# EAGLE board 08C-005 (EAGLE 6.3)
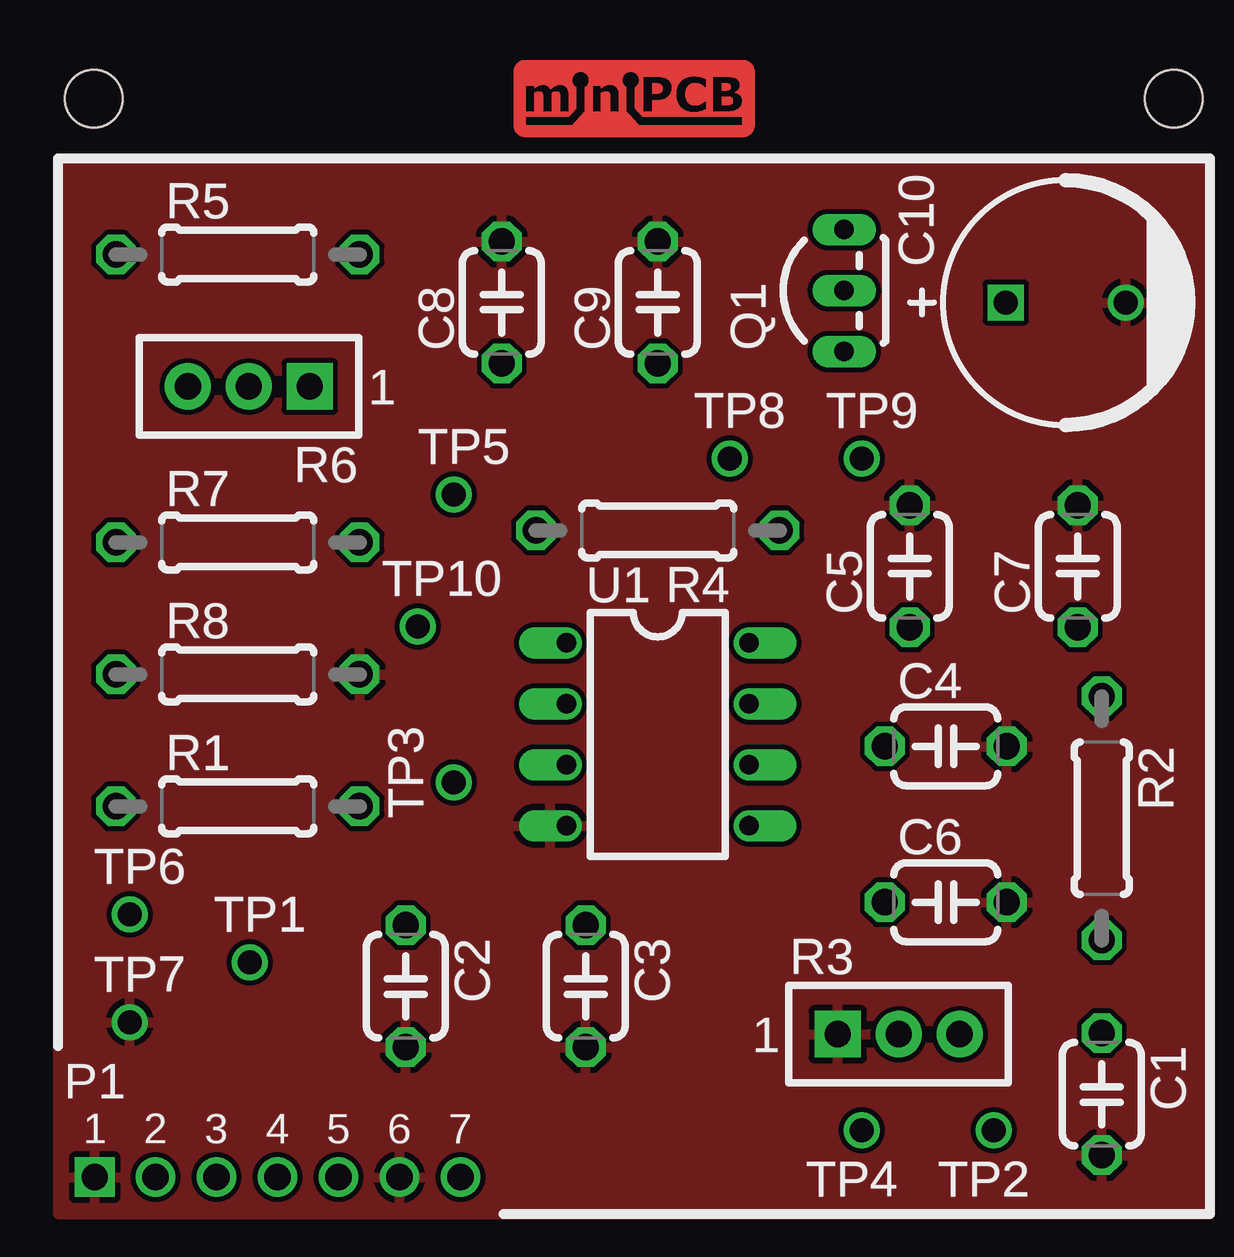
[diagram p0: board, top side]
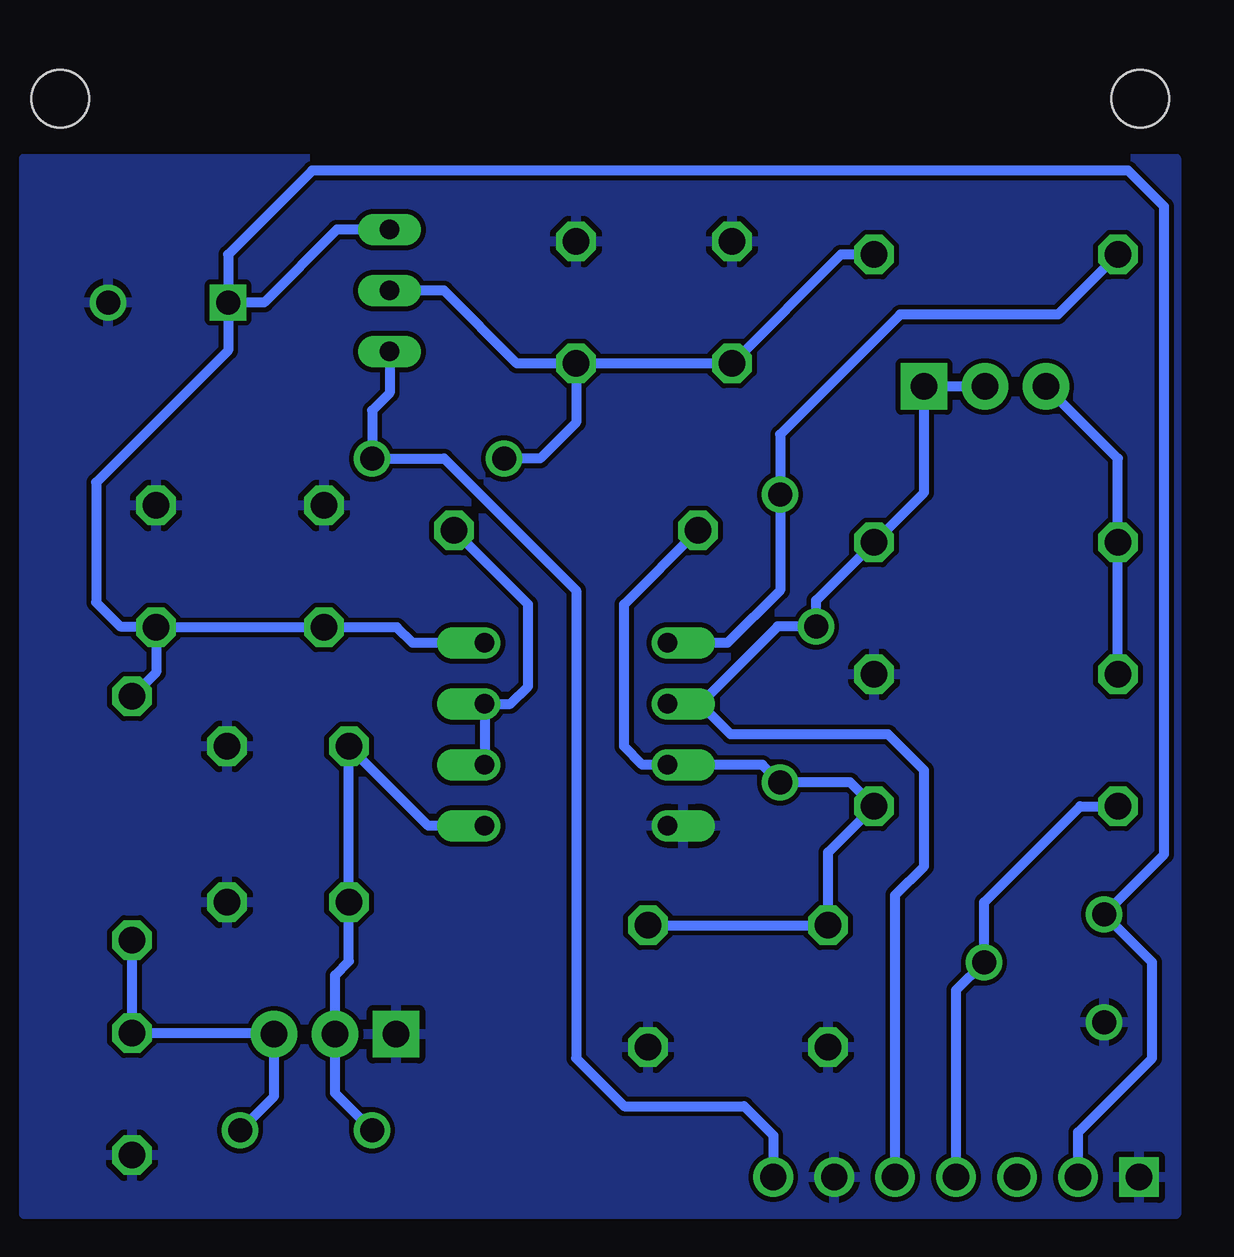
[diagram p1: board, bottom side, seen from below]

No outline drawn. Coordinates in mm, seen from the top.
Copper layers (1*16): Top 0.035mm / dielectric 1.5mm / Bottom 0.035mm
Design rules "minipcb": minimum track width 10mil, minimum drill 24mil, track to track 8mil, track to pad 8mil, pad to pad 8mil, via to via 8mil, smd to smd 8mil, copper to edge 40mil, drill to drill 8mil, minimum pad ring 10mil, minimum via ring 8mil, stop-mask expansion 4mil, vias tented up to drill 20mil, thermal gap 10mil

## Footprints (pad centres in the part's own frame; a part is rotated, then mirrored left to right if it is on the bottom)
C050-024X044 = drill 1.1 octagon: 1 -2.54,0; 2 2.54,0
C5MM = drill 1 square: + -2.5,0 | drill 1: - 2.5,0
MINIPCB_7P_50X50 = drill 1.1 square: 1 2.54,2.54 | drill 1.1: 2 5.08,2.54; 3 7.62,2.54; 4 10.16,2.54; 5 12.7,2.54; 6 15.24,2.54; 7 17.78,2.54 | hole 2.4: 47.5,47.5; 2.5,47.5
TO92-EBC-OVAL = drill 0.813 long: B 0,-1.27; C 2.54,-1.27; E -2.54,-1.27
0207/10 = drill 1.1 octagon: 1 -5.08,0; 2 5.08,0
TRIM_0100 = drill 1.1 pad 1.93 square: 1 0,0 | drill 1.1 pad 1.93: 2 2.54,0; 3 5.08,0
PINS_1_TESTPOINT_KE5000_NOTEXT = drill 1: 1 0,0
DIL08 = drill 0.813 offset: 1 -3.81,-3.81; 2 -1.27,-3.81; 3 1.27,-3.81; 4 3.81,-3.81; 5 3.81,3.81; 6 1.27,3.81; 7 -1.27,3.81; 8 -3.81,3.81

## Placement (x,y rotation side)
C1  [C050-024X044]  44.5,6 270 top
C2  [C050-024X044]  15.5,10.5 270 top
C3  [C050-024X044]  23,10.5 270 top
C4  [C050-024X044]  38,20.5 0 top
C5  [C050-024X044]  36.5,28 90 top
C6  [C050-024X044]  38,14 0 top
C7  [C050-024X044]  43.5,28 90 top
C8  [C050-024X044]  19.5,39 90 top
C9  [C050-024X044]  26,39 90 top
C10  [C5MM]  43,39 0 top
P1-  [MINIPCB_7P_50X50]  0,0 0 top
Q1  [TO92-EBC-OVAL]  32.5,39.5 90 top
R1  [0207/10]  8.5,18 0 top
R2  [0207/10]  44.5,17.5 270 top
R3  [TRIM_0100]  33.5,8.5 0 top
R4  [0207/10]  26,29.5 180 top
R5  [0207/10]  8.5,41 0 top
R6  [TRIM_0100]  11.5,35.5 180 top
R7  [0207/10]  8.5,29 0 top
R8  [0207/10]  8.5,23.5 0 top
TP1  [PINS_1_TESTPOINT_KE5000_NOTEXT]  9,11.5 0 top
TP2  [PINS_1_TESTPOINT_KE5000_NOTEXT]  40,4.5 180 top
TP3  [PINS_1_TESTPOINT_KE5000_NOTEXT]  17.5,19 90 top
TP4  [PINS_1_TESTPOINT_KE5000_NOTEXT]  34.5,4.5 180 top
TP5  [PINS_1_TESTPOINT_KE5000_NOTEXT]  17.5,31 0 top
TP6  [PINS_1_TESTPOINT_KE5000_NOTEXT]  4,13.5 0 top
TP7  [PINS_1_TESTPOINT_KE5000_NOTEXT]  4,9 0 top
TP8  [PINS_1_TESTPOINT_KE5000_NOTEXT]  29,32.5 0 top
TP9  [PINS_1_TESTPOINT_KE5000_NOTEXT]  34.5,32.5 0 top
TP10  [PINS_1_TESTPOINT_KE5000_NOTEXT]  16,25.5 0 top
U1  [DIL08]  26,21 270 top

## Library data of the parts
C1-C10 Q1 R1-R8 TP1-TP10 U1 = minipcb
P1- = minipcb; PART_NUMBER: X08C-005-A; REVISION: A

## Nets
BIAS: C4.1 C6.1 R3.2 TP4.1 U1.5
GND: C1.2 C2.2 C3.2 C4.2 C5.2 C6.2 C7.2 C8.2 C9.2 C10.- P1-.1 P1-.6 R3.1 R8.2 TP7.1 U1.4
IN: R4.1 U1.6 U1.7
N$1: C2.1 C3.1 R1.2 R4.2 TP3.1 U1.3
N$2: P1-.4 R1.1 TP1.1
OUT+: P1-.7 Q1.E TP9.1
OUT-: P1-.5 R6.1 R6.2 R7.2 TP10.1 U1.2
Q1.B: C8.1 C9.1 Q1.B R5.2 TP8.1
R2.3: C1.1 R2.2 R3.3 TP2.1
R6.3: R6.3 R7.1 R8.1
U1.1: R5.1 TP5.1 U1.1
V+: C5.1 C7.1 C10.+ P1-.2 Q1.C R2.1 TP6.1 U1.8

## Tracks (layer width: path | path; a pad name or v marks a point on that pad's centre or on a via)
BIAS
  Bottom 0.406: TP4.1 36.04,6.04 R3.2 36.04,10.96 35.46,11.54 C6.1 C4.1 32.15,17.19 U1.5
GND
  pour Bottom: 1,1 49,1 49,45 2,45 1,45
  pour Top: 1,1 49,1 49,45 2,45 1,45
IN
  Bottom 0.406: U1.6 U1.7 28.73,22.27 28,23 28,26.42 R4.1
N$1
  Bottom 0.406: R4.2 24,26.42 24,20.5 23.23,19.73 U1.3 18.23,19.73 TP3.1 14.58,19 R1.2 15.5,16.08 C2.1 C3.1
N$2
  Bottom 0.406: P1-.4 10.16,10.34 TP1.1 9,14 5,18 R1.1
OUT+
  Bottom 0.406: Q1.E 33.77,35.23 34.5,34.5 TP9.1 31.5,32.5 26,27 26,7.5 24,5.5 19,5.5 17.78,4.28 P1-.7
OUT-
  Bottom 0.406: P1-.5 12.7,14.3 11.5,15.5 11.5,19.5 13,21 19.56,21 20.83,22.27 | R6.2 R6.1 11.5,31.08 R7.2 16,26.58 TP10.1 17.6,25.5 20.83,22.27 | 20.83,22.27 U1.2
Q1.B
  Bottom 0.406: R5.2 14.96,41 C8.1 C9.1 | C9.1 26,34 27.5,32.5 TP8.1 | C9.1 28.46,36.46 31.5,39.5 Q1.B
R2.3
  Bottom 0.406: TP2.1 38.58,5.92 R3.3 38.62,8.54 C1.1 R2.2
R6.3
  Bottom 0.406: R8.1 R7.1 3.42,32.5 R6.3
U1.1
  Bottom 0.406: R5.1 5.92,38.5 12.5,38.5 17.5,33.5 TP5.1 17.5,27 19.69,24.81 U1.1
V+
  Bottom 0.406: P1-.2 5.08,4.42 2,7.5 2,11.5 TP6.1 1.5,16 1.5,43 3,44.5 37,44.5 40.5,41 C10.+ | Q1.C 35.96,42.04 39,39 C10.+ | U1.8 32.81,24.81 33.46,25.46 C5.1 C7.1 | C7.1 43.5,23.58 R2.1 | C10.+ 40.5,37 46,31.5 46,26.5 45,25.5 43.54,25.5 C7.1

## Text on the board
_tNames: R5 | C10 | C8 | C9 | Q1 | TP8 | TP9 | R6 | TP5 | R7 | R4 | TP10 | U1 | C5 | C7 | R8 | C4 | R2 | R1 | TP3 | C6 | TP6 | TP1 | C2 | C3 | R3 | TP7 | C1 | TP4 | TP2